# EAGLE board new (EAGLE 9.6.1)
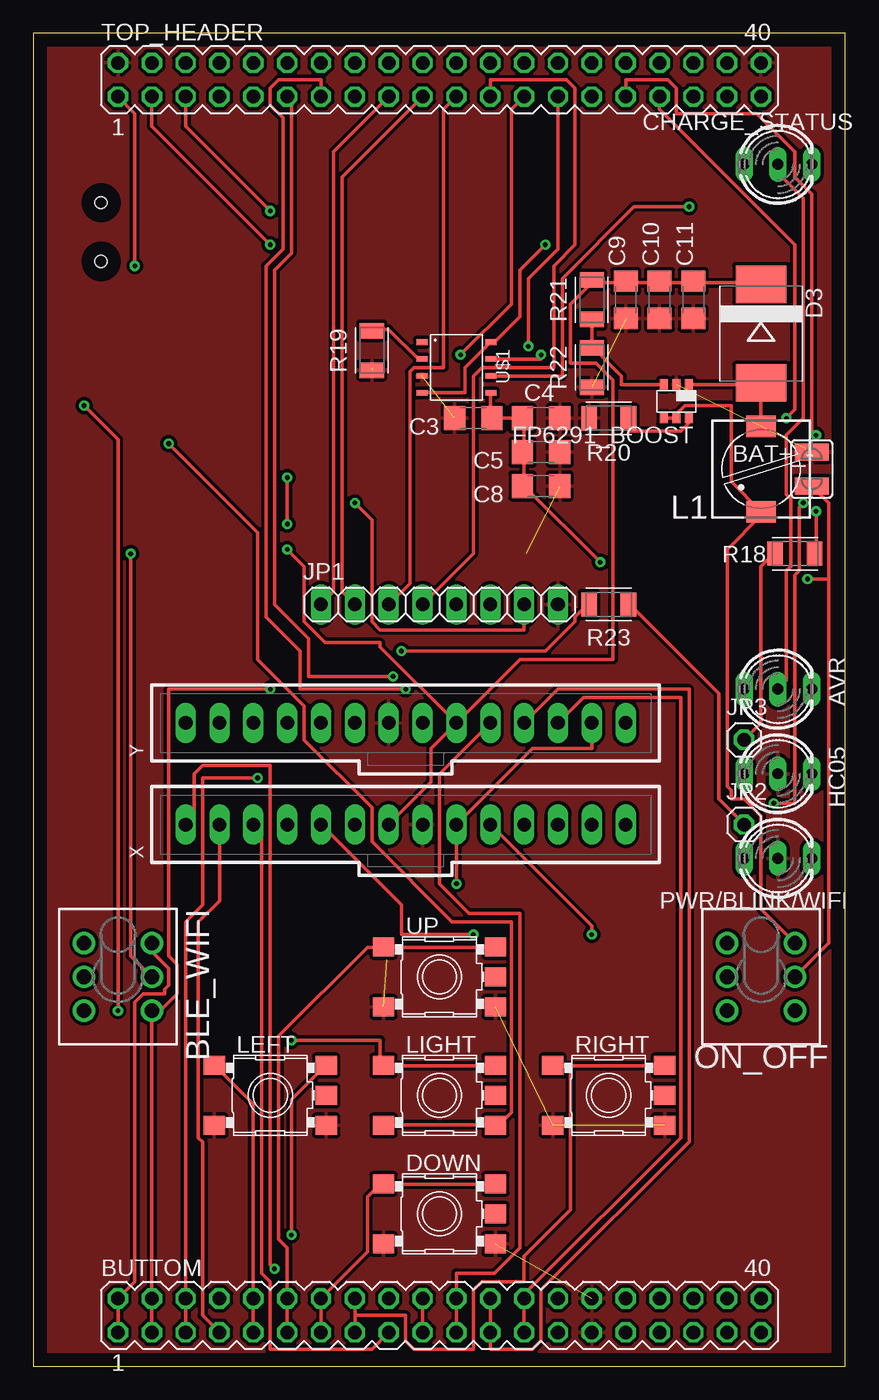
[diagram p0: board, top side]
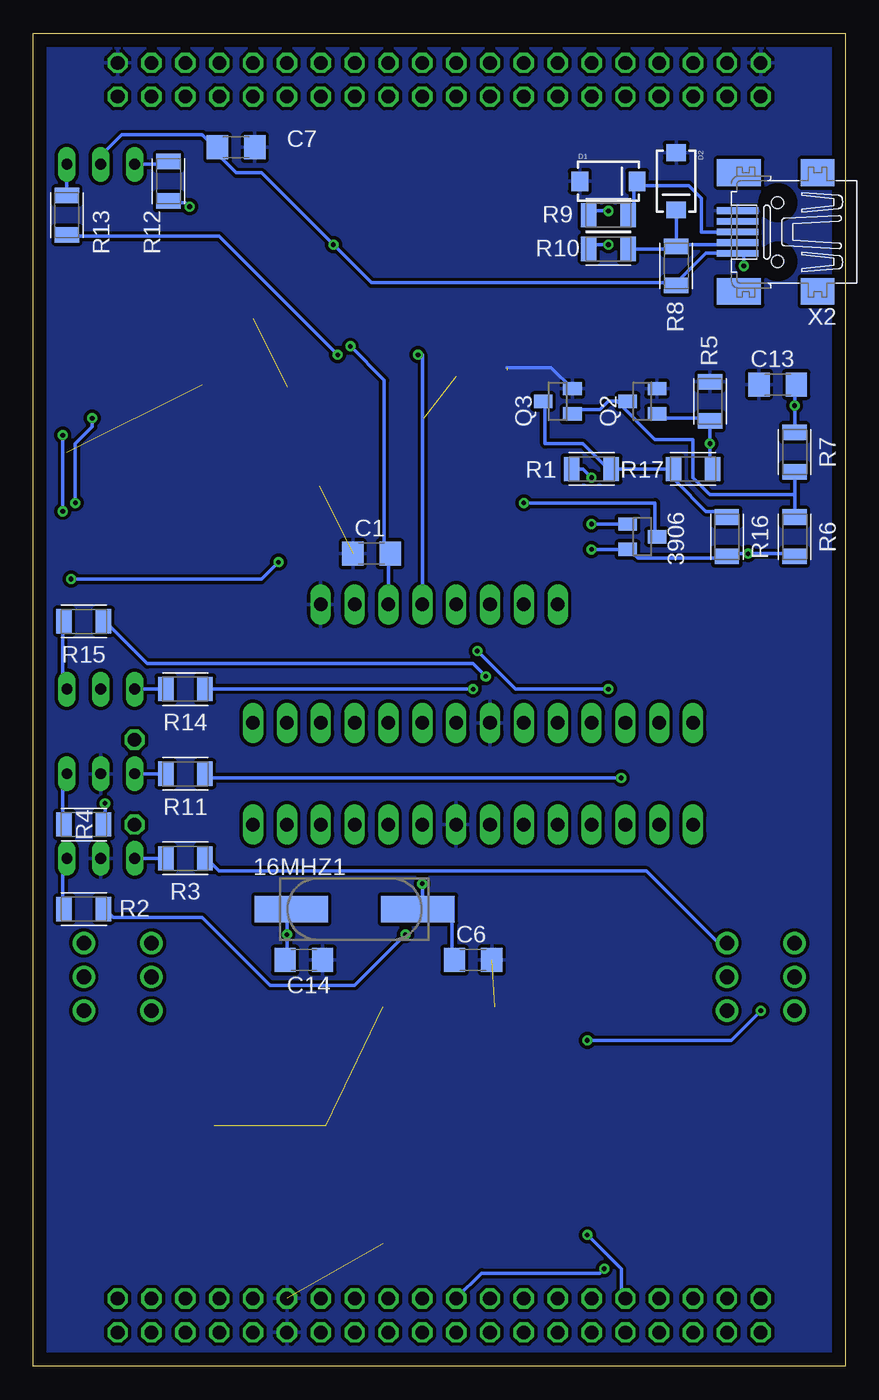
[diagram p1: board, bottom side, seen from below]

Size 60.94 x 100 mm. Coordinates in mm from the lower left corner, seen from the top.
Outline: 0,0 60.94,0 60.94,100 0,100 0,0
Copper layers (1*16): Top 0.035mm / dielectric 1.5mm / Bottom 0.035mm
Design rules "default": minimum track width 6mil, minimum drill 0.35mm, track to track 6mil, track to pad 6mil, pad to pad 6mil, via to via 6mil, smd to smd 6mil, copper to edge 40mil, drill to drill 6mil, minimum pad ring 10mil, minimum via ring 8mil, stop-mask expansion 4mil, vias tented up to drill 0mil, thermal gap 10mil
Net classes: 0 default: width 0.254 mm, clearance 0.254 mm; 1 POWER: width 0.254 mm, clearance 0.254 mm

## Footprints (pad centres in the part's own frame; a part is rotated, then mirrored left to right if it is on the bottom)
CSM-7X-DU = smd 5.5 x 2: 1 -4.75,0; 2 4.75,0
SOT23 = smd 1 x 1.4: 1 -0.95,-1.1; 2 0.95,-1.1; 3 0,1.1
DUOLED-A-5MM = drill 0.813 long: A 0,0; CR 2.54,0; CX -2.54,0
SJW = smd 1.27 x 2.54: 1 -1.27,0; 2 1.27,0
TL4XPO = drill 1.1 pad 1.676: 1 -2.54,2.54; 2 0,2.54; 3 2.54,2.54; 4 -2.54,-2.54; 5 0,-2.54; 6 2.54,-2.54
MA20-2 = drill 1.016 octagon: 1 -24.13,-1.27; 2 -24.13,1.27; 3 -21.59,-1.27; 4 -21.59,1.27; 5 -19.05,-1.27; 6 -19.05,1.27; 7 -16.51,-1.27; 8 -16.51,1.27; 9 -13.97,-1.27; 10 -13.97,1.27; 11 -11.43,-1.27; 12 -11.43,1.27; 13 -8.89,-1.27; 14 -8.89,1.27; 15 -6.35,-1.27; 16 -6.35,1.27; 17 -3.81,-1.27; 18 -3.81,1.27; 19 -1.27,-1.27; 20 -1.27,1.27; 21 1.27,-1.27; 22 1.27,1.27; 23 3.81,-1.27; 24 3.81,1.27; 25 6.35,-1.27; 26 6.35,1.27; 27 8.89,-1.27; 28 8.89,1.27; 29 11.43,-1.27; 30 11.43,1.27; 31 13.97,-1.27; 32 13.97,1.27; 33 16.51,-1.27; 34 16.51,1.27; 35 19.05,-1.27; 36 19.05,1.27; 37 21.59,-1.27; 38 21.59,1.27; 39 24.13,-1.27; 40 24.13,1.27
C1206 = smd 1.6 x 1.8: 1 -1.4,0; 2 1.4,0
SMA-DIODE = smd 1.27 x 1.47: A -2.15,0; C 2.15,0
SMC = smd 2.8 x 3.8: A 3.7,0; C -3.7,0
SKHMPXE010 = smd 1.6 x 1.4: 1 -4.2,2.25; 2 4.2,2.25; 3 -4.2,-2.25; 4 4.2,-2.25; 5 4.2,0
TSOT23-6_DDC = smd 0.6 x 0.8: 1 -0.95,-1.25; 2 0,-1.25; 3 0.95,-1.25; 4 0.95,1.25; 5 0,1.25; 6 -0.95,1.25
DUOLED-C-5MM = drill 0.813 long: AR 2.54,0; AX -2.54,0; C 0,0
1X08 = drill 1.016 long: 1 -8.89,0; 2 -6.35,0; 3 -3.81,0; 4 -1.27,0; 5 1.27,0; 6 3.81,0; 7 6.35,0; 8 8.89,0
1X01 = drill 1.016 octagon: 1 0,0
PIS2816 = smd 2.2 x 1.6: 1 0,3.2; 2 0,-3.2
RESC3216X70 = smd 1.165 x 1.815: 1 -1.475,0; 2 1.475,0
SOT23-8 = smd 0.42 x 0.835: 1 -1.905,-2.58; 2 -0.635,-2.58; 3 0.635,-2.58; 4 1.905,-2.58; 5 1.905,2.58; 6 0.635,2.58; 7 -0.635,2.58; 8 -1.905,2.58
70543-14 = drill 1.016 long: 1 -16.51,0; 2 -13.97,0; 3 -11.43,0; 4 -8.89,0; 5 -6.35,0; 6 -3.81,0; 7 -1.27,0; 8 1.27,0; 9 3.81,0; 10 6.35,0; 11 8.89,0; 12 11.43,0; 13 13.97,0; 14 16.51,0
32005-201 = smd 3.1 x 0.5: 1 3,1.6; 2 3,0.8; 3 3,0; 4 3,-0.8; 5 3,-1.6 | smd 2.5 x 2: M1 -3,-4.45; M2 -3,4.45 | smd 3.3 x 2: M3 2.9,4.45; M4 2.9,-4.45 | hole 0.9: 0,2.2; 0,-2.2

## Placement (x,y rotation side)
16MHZ1  CSM-7X-DU  [CSM-7X-DU]  36.83,34.29 0 bottom
3906  [SOT23]  15.24,62.23 270 bottom
AVR  [DUOLED-A-5MM]  55.88,50.8 0 top
BAT+_-  [SJW]  58.42,67.31 270 top
BLE_WIFI  TL46PO  [TL4XPO]  6.35,29.21 270 top
BUTTOM  [MA20-2]  30.48,3.81 0 top
C1  100nf  [C1206]  35.56,60.96 0 bottom
C3  10uf  [C1206]  33.02,71.12 180 top
C4  0.1uf  [C1206]  38.1,71.12 0 top
C5  10uf  [C1206]  38.1,68.58 0 top
C6  22pf  [C1206]  27.94,30.48 0 bottom
C7  10uf  [C1206]  45.72,91.44 180 bottom
C8  10uf  [C1206]  38.1,66.04 0 top
C9  10uf  [C1206]  44.45,80.01 270 top
C10  10uf  [C1206]  46.99,80.01 270 top
C11  0.1uf  [C1206]  49.53,80.01 270 top
C13  0.47uf  [C1206]  5.08,73.66 180 bottom
C14  22pf  [C1206]  40.64,30.48 0 bottom
CHARGE_STATUS  [DUOLED-A-5MM]  55.88,90.17 0 top
D1  3V6  [SMA-DIODE]  17.78,88.9 0 bottom
D2  3V6  [SMA-DIODE]  12.7,88.9 270 bottom
D3  1N5388BRLG  [SMC]  54.61,77.47 270 top
DOWN  SKHMPSE010  [SKHMPXE010]  30.48,11.43 0 top
FP6291_BOOST  TPS61070DDC  [TSOT23-6_DDC]  48.26,72.39 180 top
HC05  [DUOLED-C-5MM]  55.88,44.45 0 top
JP1  8 pin  [1X08]  30.48,57.15 0 top
JP2  [1X01]  53.34,40.64 0 top
JP3  [1X01]  53.34,46.99 0 top
L1  [PIS2816]  54.61,67.31 180 top
LEFT  SKHMPSE010  [SKHMPXE010]  17.78,20.32 0 top
LIGHT  SKHMPSE010  [SKHMPXE010]  30.48,20.32 0 top
ON_OFF  TL46PO  [TL4XPO]  54.61,29.21 270 top
PWR/BLINK/WIFI  [DUOLED-C-5MM]  55.88,38.1 0 top
Q2  3904  [SOT23]  15.24,72.39 90 bottom
Q3  3904  [SOT23]  21.59,72.39 90 bottom
R1  10k  [RESC3216X70]  19.05,67.31 0 bottom
R2  1k  [RESC3216X70]  57.15,34.29 180 bottom
R3  1k  [RESC3216X70]  49.53,38.1 180 bottom
R4  1k  [RESC3216X70]  57.15,40.64 180 bottom
R5  470k  [RESC3216X70]  10.16,72.39 270 bottom
R6  10k  [RESC3216X70]  3.81,62.23 270 bottom
R7  100k  [RESC3216X70]  3.81,68.58 270 bottom
R8  2k2  [RESC3216X70]  12.7,82.55 270 bottom
R9  68  [RESC3216X70]  17.78,86.36 180 bottom
R10  68  [RESC3216X70]  17.78,83.82 180 bottom
R11  1k  [RESC3216X70]  49.53,44.45 180 bottom
R12  1k  [RESC3216X70]  50.8,88.9 90 bottom
R13  1k  [RESC3216X70]  58.42,86.36 90 bottom
R14  1k  [RESC3216X70]  49.53,50.8 180 bottom
R15  1k  [RESC3216X70]  57.15,55.88 180 bottom
R16  1k  [RESC3216X70]  8.89,62.23 270 bottom
R17  150k  [RESC3216X70]  11.43,67.31 0 bottom
R18  1k  [RESC3216X70]  57.15,60.96 0 top
R19  1.2k  [RESC3216X70]  25.4,76.2 90 top
R20  48k  [RESC3216X70]  43.18,71.12 0 top
R21  88k  [RESC3216X70]  41.91,80.01 90 top
R22  12k  [RESC3216X70]  41.91,74.93 90 top
R23  1k  [RESC3216X70]  43.18,57.15 180 top
RIGHT  SKHMPSE010  [SKHMPXE010]  43.18,20.32 0 top
TOP_HEADER  [MA20-2]  30.48,96.52 0 top
U$1  TP4056  [SOT23-8]  31.75,74.93 270 top
UP  SKHMPSE010  [SKHMPXE010]  30.48,29.21 0 top
X  C-GRID-14-70543  [70543-14]  27.94,40.64 0 top
X2  MINI-USB-32005-201  [32005-201]  5.08,85.09 180 bottom
Y  C-GRID-14-70543  [70543-14]  27.94,48.26 0 top

## Library data of the parts
16MHZ1 = crystal; OC_FARNELL: unknown; OC_NEWARK: unknown
3906 Q2 Q3 = semicon-smd-ipc
AVR CHARGE_STATUS HC05 PWR/BLINK/WIFI = led
BAT+_- = jumper
BLE_WIFI DOWN LEFT LIGHT ON_OFF RIGHT UP = switch
BUTTOM TOP_HEADER = con-lstb; OC_FARNELL: unknown; OC_NEWARK: unknown
C1 C3-C11 C13 C14 = rcl; SPICEPREFIX: C
D1 D2 = sparkfun
D3 = diode
FP6291_BOOST = texas; MPN: TPS61070DDCR; OC_FARNELL: 1461062; OC_NEWARK: 64M3125
JP1-JP3 = pinhead
L1 = rcl; SPICEPREFIX: L
R1-R23 = Resistor; CATEGORY: Resistor; SUB-CATEGORY: Fixed
U$1 = TP4056
X Y = con-molex; MF: MOLEX; OC_FARNELL: unknown; OC_NEWARK: unknown
X2 = con-cypressindustries; OC_FARNELL: unknown; OC_NEWARK: unknown

## Nets
5V_OUT: 3906.2 BLE_WIFI.2 C9.1 C10.1 C11.1 D3.C R6.2 R16.2 R21.2 X.7 Y.9
BACKLIGHT_VCC: 3906.3 JP1.7
BAT+: BAT+_-.2 C3.1 C4.1 C5.1 C8.1 ON_OFF.2 U$1.5
BLE_PROG: BUTTOM.5 BUTTOM.6 R11.1
BLINK: R2.1 X.5
CE_PD6: JP1.2 TOP_HEADER.19
CHARGE: R12.1 U$1.6
CHARGE_FULL: R13.1 U$1.7
CLK_PD4: JP1.5 TOP_HEADER.25
D1+: BUTTOM.37
D1-: BUTTOM.39
D+: R9.2 TOP_HEADER.5
D-: R10.2 TOP_HEADER.3
DC_PD5: JP1.3 TOP_HEADER.21
DIN_PD1: JP1.4 TOP_HEADER.23
DOWN_PC3: BUTTOM.13 BUTTOM.14 DOWN.1 DOWN.2
ERROR: R4.1 TOP_HEADER.33
FP1: FP6291_BOOST.4 FP6291_BOOST.5 L1.1 ON_OFF.1
GND [POWER]: BAT+_-.1 BUTTOM.29 BUTTOM.30 C1.1 C3.2 C4.2 C5.2 C6.2 C7.1 C8.2 C9.2 C10.2 C11.2 C13.2 C14.2 D1.A D2.A DOWN.3 DOWN.4 FP6291_BOOST.2 HC05.C JP1.8 LEFT.3 LEFT.4 PWR/BLINK/WIFI.C Q2.2 Q3.2 R5.1 R19.1 R20.1 R22.1 RIGHT.3 RIGHT.4 TOP_HEADER.2 TOP_HEADER.40 U$1.3 UP.3 UP.4 X2.5 X.8 Y.7
HB: R18.2 TOP_HEADER.31
LED_A: R14.1 TOP_HEADER.13
LED_W: R15.1 TOP_HEADER.11
LEFT_PC2: BUTTOM.9 BUTTOM.10 LEFT.1 LEFT.2
N$1: PWR/BLINK/WIFI.AR R2.2
N$2: PWR/BLINK/WIFI.AX R3.2
N$3: HC05.AR R4.2
N$4: HC05.AX R11.2
N$5: 3906.1 R1.1
N$6: D1.C R9.1 X2.3
N$7: D2.C R8.1 R10.1 X2.2
N$8: C13.1 LIGHT.1 LIGHT.2 R7.1
N$9: LIGHT.3 LIGHT.4 Q2.1 R5.2 R17.2
N$10: CHARGE_STATUS.CX R12.2
N$11: 16MHZ1.2 C6.1 X.9 Y.13
N$12: R19.2 U$1.2
N$13: AVR.CX R14.2
N$14: CHARGE_STATUS.CR R13.2
N$15: AVR.CR R15.2
N$16: Q3.3 R1.2 R16.1 R17.1
N$17: D3.A FP6291_BOOST.1 L1.2
N$18: FP6291_BOOST.6 R20.2
N$19: Q2.3 Q3.1 R6.1 R7.2
N$20: FP6291_BOOST.3 R21.1 R22.2
N$21: JP3.1 R18.1
N$22: JP2.1 R23.1
N$29: 16MHZ1.1 C14.1 X.10
N$41: BUTTOM.27
NEW_RX: BUTTOM.7 X.2
NEW_TX: BUTTOM.17 X.3
PWR: BLE_WIFI.1 BUTTOM.1 BUTTOM.2 R3.1
RIGHT_PC5: BUTTOM.15 BUTTOM.16 RIGHT.1 RIGHT.2
RST_PD7: JP1.1 TOP_HEADER.17
T_CLK: BUTTOM.21 BUTTOM.22 Y.10
T_MISO: BUTTOM.23 BUTTOM.24 Y.11
T_MOSI: BUTTOM.25 BUTTOM.26 Y.12
T_RST: BUTTOM.19 BUTTOM.20 X.1
T_VCC: BUTTOM.31
UP_PC4: BUTTOM.11 BUTTOM.12 UP.1 UP.2
VCC [POWER]: AVR.A C7.2 CHARGE_STATUS.A R8.2 TOP_HEADER.1 U$1.4 U$1.8 X2.1
VCC_PB7: C1.2 JP1.6 TOP_HEADER.27
WIFI_BLE: BLE_WIFI.3 BUTTOM.3 BUTTOM.4 R23.2

## Tracks (layer width: path | path; a pad name or v marks a point on that pad's centre or on a via)
5V_OUT  (via drill 0.35)
  Top 0.254: BLE_WIFI.2 7.3,30.8 v7.3,60.96 | X.7 29.84,43.81 29.84,46.35 Y.9 | 41.91,81.28 44.45,81.28 | 44.45,81.28 46.99,81.28 | 44.45,81.28 C9.1 | 46.99,81.28 49.53,81.28 | 46.99,81.28 C10.1 | 49.53,81.28 54.61,81.28 D3.C | 49.53,81.28 C11.1 | Y.9 36.51,53.02 43.5,53.02 43.5,73.98 42.23,75.25 40.32,75.25 40.32,79.69 41.91,81.28 | 41.91,81.28 R21.2 | v19.05,61.28 20.32,60.01 20.32,55.88 21.91,54.29 26.04,54.29 26.04,53.98 Y.9
  Bottom 0.254: R6.2 3.81,60.96 v7.3,60.96 8.89,60.96 R16.2 8.89,60.64 15.56,60.64 16.19,61.28 3906.2 16.51,61.28 v19.05,61.28
BACKLIGHT_VCC  (via drill 0.35)
  Top 0.254: v24.13,64.77 25.4,63.5 25.4,55.88 26.04,55.24 36.83,55.24 JP1.7
  Bottom 0.254: v24.13,64.77 14.29,64.77 14.29,62.23 3906.3
BAT+  (via drill 0.35)
  Top 0.254: 36.83,68.58 36.83,66.04 | U$1.5 34.29,73.03 34.29,71.12 C3.1 C4.1 36.83,71.12 36.83,68.58 | 36.83,68.58 C5.1 | BAT+_-.2 59.69,64.77 59.69,59.05 | 59.69,59.05 59.69,31.75 ON_OFF.2 | v42.55,60.33 36.83,66.04 | 59.69,59.05 v58.1,59.05 | 36.83,66.04 C8.1
  Bottom 0.254: v42.55,60.33 43.81,59.05 v58.1,59.05
BLE_PROG  (via drill 0.35)
  Top 0.254: v16.83,44.13 12.7,44.13 12.7,34.61 11.43,33.34 BUTTOM.6 BUTTOM.5
  Bottom 0.254: v16.83,44.13 47.62,44.13 47.94,44.45 R11.1
BLINK  (via drill 0.35)
  Top 0.254: v33.02,32.38 27.62,32.38 27.62,34.61 X.5
  Bottom 0.254: v33.02,32.38 36.83,28.57 43.18,28.57 48.26,33.66 54.93,33.66 55.56,34.29 R2.1
CE_PD6
  Top 0.254: JP1.2 23.18,58.1 23.18,89.22 TOP_HEADER.19
CHARGE  (via drill 0.35)
  Top 0.254: U$1.6 39.69,74.3 39.69,81.6 45.09,87 v49.21,87
  Bottom 0.254: v49.21,87 49.53,87.31 50.8,87.31 R12.1
CHARGE_FULL  (via drill 0.35)
  Top 0.254: U$1.7 38.1,75.56 v38.1,75.88
  Bottom 0.254: v38.1,75.88 46.99,84.77 58.42,84.77 R13.1
CLK_PD4  (via drill 0.35)
  Top 0.254: v32.07,75.88 35.88,79.69 35.88,94.3 TOP_HEADER.25
  Bottom 0.254: JP1.5 31.75,75.88 v32.07,75.88
D+  (via drill 0.35)
  Top 0.254: v17.78,86.68 11.43,93.03 TOP_HEADER.5
  Bottom 0.254: v17.78,86.68 18.73,86.68 19.05,86.36 R9.2
D-  (via drill 0.35)
  Top 0.254: v17.78,84.14 8.89,93.03 TOP_HEADER.3
  Bottom 0.254: v17.78,84.14 18.73,84.14 19.05,83.82 R10.2
DC_PD5
  Top 0.254: JP1.3 28.26,58.74 28.26,74.61 28.57,74.93 30.8,74.93 30.8,94.3 TOP_HEADER.21
DIN_PD1
  Top 0.254: JP1.4 33.02,60.96 33.02,74.3 33.66,74.93 39.05,74.93 39.05,82.55 40.64,84.14 40.64,95.89 40.01,96.52 34.29,96.52 TOP_HEADER.23
DOWN_PC3
  Top 0.254: BUTTOM.13 BUTTOM.14 25.08,8.57 25.08,12.7 26.04,13.65 DOWN.1 26.35,13.65 34.61,13.65 DOWN.2
ERROR  (via drill 0.35)
  Top 0.254: v55.56,42.23 57.15,42.23 57.15,59.37 57.47,59.69 57.47,64.45 v57.78,64.77 | v56.52,71.12 57.15,71.75 57.15,84.14 46.99,94.3 TOP_HEADER.33
  Bottom 0.254: v55.56,42.23 55.56,40.64 R4.1 | v57.78,64.77 57.78,69.22 56.52,70.48 v56.52,71.12
FP1
  Top 0.254: FP6291_BOOST.4 47.31,71.12 48.26,71.12 FP6291_BOOST.5 48.26,71.44 48.9,72.07 52.39,72.07 52.39,66.36 54.61,64.14 L1.1 54.61,63.82 52.07,61.28 52.07,43.5 52.39,43.18 52.39,42.55 53.34,42.55 54.61,41.27 54.61,34.29 ON_OFF.1
GND  (9 unrouted)
  Bottom 0.254: Q3.2 22.08,74.93 25.4,74.93
  pour Top (isolate 0.254): 0,100.33 0,0 60.96,0 60.96,100.33
  pour Bottom (isolate 0.254): 0,100.33 0,0 60.96,0 60.96,100.33
HB  (via drill 0.35)
  Top 0.254: v58.74,64.14 58.74,60.96 R18.2 | v58.74,69.85 58.42,70.17 58.42,87.95 57.15,89.22 57.15,91.12 54.29,93.98 48.26,93.98 48.26,95.89 47.62,96.52 44.45,96.52 TOP_HEADER.31
  Bottom 0.254: v58.74,69.85 v58.74,64.14
LED_A  (via drill 0.35)
  Top 0.254: v27.94,50.8 20,50.8 20,53.66 17.46,56.2 17.46,82.55 18.73,83.82 18.73,93.66 17.78,94.61 17.78,95.89 18.41,96.52 21.59,96.52 TOP_HEADER.13
  Bottom 0.254: v27.94,50.8 R14.1
LED_W  (via drill 0.35)
  Top 0.254: v26.99,51.75 20.64,51.75 20.64,54.61 18.1,57.15 18.1,82.23 19.37,83.5 19.37,94.93 TOP_HEADER.11
  Bottom 0.254: v26.99,51.75 27.94,52.7 52.39,52.7 55.56,55.88 R15.1
LEFT_PC2  (via drill 0.35)
  Top 0.254: LEFT.1 13.65,22.54 16.51,19.68 BUTTOM.10 BUTTOM.9 | v19.37,9.84 19.37,20 21.91,22.54 LEFT.2
  Bottom 0.254: v19.37,9.84 16.83,7.3 16.83,5.08 BUTTOM.10
N$1
  Bottom 0.254: PWR/BLINK/WIFI.AR 58.74,38.1 58.74,34.29 R2.2
N$2
  Bottom 0.254: PWR/BLINK/WIFI.AX R3.2
N$3
  Bottom 0.254: HC05.AR 58.74,44.45 58.74,40.64 R4.2
N$4
  Bottom 0.254: HC05.AX R11.2
N$5  (via drill 0.35)
  Top 0.254: v19.05,66.67 v19.05,63.18
  Bottom 0.254: v19.05,63.18 16.51,63.18 3906.1 | v19.05,66.67 19.68,67.31 R1.1
N$6
  Bottom 0.254: R9.1 15.88,86.36 15.88,88.9 D1.C 15.56,88.9 15.24,88.58 11.75,88.58 10.79,87.63 10.79,85.09 X2.3
N$7
  Bottom 0.254: 12.7,84.14 D2.C | R10.1 12.7,83.82 R8.1 12.7,84.14 | 12.7,84.14 8.26,84.14 X2.2
N$8  (via drill 0.35)
  Top 0.254: LIGHT.2 34.61,22.54 26.35,22.54 LIGHT.1 26.04,22.86 26.04,24.45 v19.37,24.45 | v3.81,72.07 6.35,69.53 v6.35,26.67
  Bottom 0.254: R7.1 v3.81,72.07 3.81,73.66 C13.1 | v6.35,26.67 8.57,24.45 v19.37,24.45
N$9  (via drill 0.35)
  Top 0.254: LIGHT.3 26.35,18.1 34.61,18.1 LIGHT.4 34.92,18.1 35.88,19.05 35.88,33.34 31.43,33.34 25.4,39.37 25.4,41.91 20.32,46.99 20.32,49.53 16.83,53.02 16.83,62.55 v10.16,69.22
  Bottom 0.254: Q2.1 13.97,71.44 13.65,71.12 10.16,71.12 R5.2 v10.16,69.22 10.16,67.31 R17.2
N$10
  Bottom 0.254: CHARGE_STATUS.CX 50.8,90.17 R12.2
N$11  (via drill 0.35)
  Top 0.254: Y.13 41.91,46.35 37.47,46.35 X.9 v31.75,36.2
  Bottom 0.254: 31.75,34.29 16MHZ1.2 32.07,34.29 | 31.75,34.29 29.53,34.29 29.53,30.48 C6.1 | v31.75,36.2 31.75,34.29
N$12
  Top 0.254: U$1.2 28.89,75.56 26.67,77.79 25.4,77.79 R19.2
N$13
  Bottom 0.254: AVR.CX R14.2
N$14
  Bottom 0.254: CHARGE_STATUS.CR R13.2
N$15
  Bottom 0.254: AVR.CR 58.74,50.8 58.74,55.88 R15.2
N$16
  Bottom 0.254: R16.1 8.89,63.82 9.21,64.14 10.48,64.14 12.7,66.36 12.7,67.31 R17.1 R1.2 17.78,67.31 19.68,69.22 22.54,69.22 22.54,72.39 Q3.3
N$17
  Top 0.254: 54.61,73.66 49.21,73.66 FP6291_BOOST.1 | 54.61,73.66 L1.2 | 54.61,73.66 D3.A
N$18
  Top 0.254: FP6291_BOOST.6 49.21,71.12 49.21,70.8 48.58,70.17 44.77,70.17 44.77,71.12 R20.2
N$19
  Bottom 0.254: R7.2 3.81,65.41 | 3.81,65.41 R6.1 | Q2.3 17.14,72.39 | 17.14,72.39 17.78,72.39 18.41,71.75 20.32,71.75 Q3.1 | 3.81,65.41 10.16,65.41 11.43,66.67 11.43,69.53 14.29,69.53 17.14,72.39
N$20
  Top 0.254: 41.91,76.52 44.13,74.3 44.13,73.66 47.31,73.66 FP6291_BOOST.3 | 41.91,76.52 R21.1 | 41.91,76.52 R22.2
N$21
  Top 0.254: JP3.1 54.61,48.26 54.61,60.01 55.56,60.96 R18.1
N$22
  Top 0.254: JP2.1 51.44,42.55 51.44,50.48 44.77,57.15 R23.1
N$29  (via drill 0.35)
  Top 0.254: X.10 41.91,33.02 v41.91,32.38
  Bottom 0.254: 16MHZ1.1 41.91,34.29 v41.91,32.38 41.91,30.48 C14.1
NEW_RX
  Top 0.254: BUTTOM.7 12.7,3.81 12.7,16.83 12.38,17.14 12.38,33.34 13.97,34.92 X.2
NEW_TX
  Top 0.254: BUTTOM.17 25.4,1.27 17.78,1.27 17.78,6.35 17.14,6.99 17.14,40.01 X.3
PWR
  Top 0.254: BUTTOM.1 BUTTOM.2 7.62,6.35 7.62,27.3 8.26,27.94 9.84,27.94 9.84,28.26 10.16,28.57 10.16,29.84 8.89,31.11 BLE_WIFI.1
  Bottom 0.254: BLE_WIFI.1 9.53,31.75 14.92,37.15 46.99,37.15 47.94,38.1 R3.1
RIGHT_PC5
  Top 0.254: BUTTOM.16 24.13,3.81 | 24.13,3.81 BUTTOM.15 | 40.32,22.54 47.31,22.54 RIGHT.2 | 40.32,22.54 39.05,22.54 RIGHT.1 | 24.13,3.81 27.94,3.81 27.94,1.91 28.57,1.27 33.02,1.27 33.02,5.71 33.66,6.35 36.83,6.35 36.83,8.26 40.32,11.75 40.32,22.54
RST_PD7
  Top 0.254: JP1.1 22.54,58.1 22.54,91.12 TOP_HEADER.17
T_CLK
  Top 0.254: BUTTOM.21 BUTTOM.22 31.75,6.99 34.61,6.99 36.51,8.89 36.51,33.97 32.7,33.97 30.48,36.2 30.48,44.45 Y.10
T_MISO
  Top 0.254: BUTTOM.24 BUTTOM.23 34.29,1.27 37.47,1.27 38.1,1.91 38.1,5.71 49.21,16.83 49.21,50.8 39.37,50.8 Y.11
T_MOSI
  Top 0.254: BUTTOM.25 BUTTOM.26 36.83,5.4 48.58,17.14 48.58,50.16 41.27,50.16 Y.12
T_RST  (via drill 0.35)
  Top 0.254: BUTTOM.20 BUTTOM.19 | X.1 12.06,41.27 12.06,44.45 12.7,45.09 17.78,45.09 17.78,7.62 v18.1,7.3
  Bottom 0.254: v18.1,7.3 18.41,6.99 27.3,6.99 BUTTOM.20
UP_PC4
  Top 0.254: BUTTOM.11 BUTTOM.12 19.05,8.89 18.41,9.53 18.41,24.77 25.08,31.43 26.04,31.43 UP.1 26.35,31.43 34.61,31.43 UP.2
VCC  (via drill 0.35)
  Top 0.254: TOP_HEADER.1 7.62,93.98 v7.62,82.55 | U$1.4 32.38,73.03 32.38,74.93 34.29,76.83 U$1.8 34.61,76.83 36.51,78.74 36.51,82.23 v38.42,84.14 | AVR.A 56.52,51.44 56.52,59.69 56.83,60.01 56.83,65.09 56.52,65.41 56.52,69.85 57.78,71.12 57.78,87.63 55.88,89.53 CHARGE_STATUS.A
  Bottom 0.254: 12.7,81.28 10.48,83.5 8.26,83.5 X2.1 7.94,83.5 7.62,83.5 v7.62,82.55 | CHARGE_STATUS.A 55.88,90.81 54.29,92.39 48.26,92.39 47.31,91.44 C7.2 46.99,91.44 46.99,90.81 45.72,89.53 43.81,89.53 v38.42,84.14 35.56,81.28 12.7,81.28 | 12.7,81.28 R8.2
VCC_PB7  (via drill 0.35)
  Top 0.254: TOP_HEADER.27 39.37,83.82 37.15,81.6 v37.15,76.52
  Bottom 0.254: JP1.6 34.29,60.96 | v37.15,76.52 34.61,73.98 34.61,60.96 34.29,60.96 | 34.29,60.96 C1.2
WIFI_BLE  (via drill 0.35)
  Top 0.254: BUTTOM.3 BUTTOM.4 BLE_WIFI.3 9.53,26.67 10.79,27.94 10.79,30.16 10.16,30.8 10.16,50.8 v17.78,50.8 | v27.62,53.66 38.42,53.66 40.64,55.88 40.64,56.2 41.59,57.15 R23.2
  Bottom 0.254: v27.62,53.66 24.77,50.8 v17.78,50.8